# Altium PCB Board_KY-001_v1.PcbDoc
Units mm, origin at the board's own origin, x right, y up, seen from the top; angles counter-clockwise.
Board outline 30 x 14 mm, 2 copper layers (Top Layer, Bottom Layer); 9 components, 5 nets, 20 pads, 90 vias.
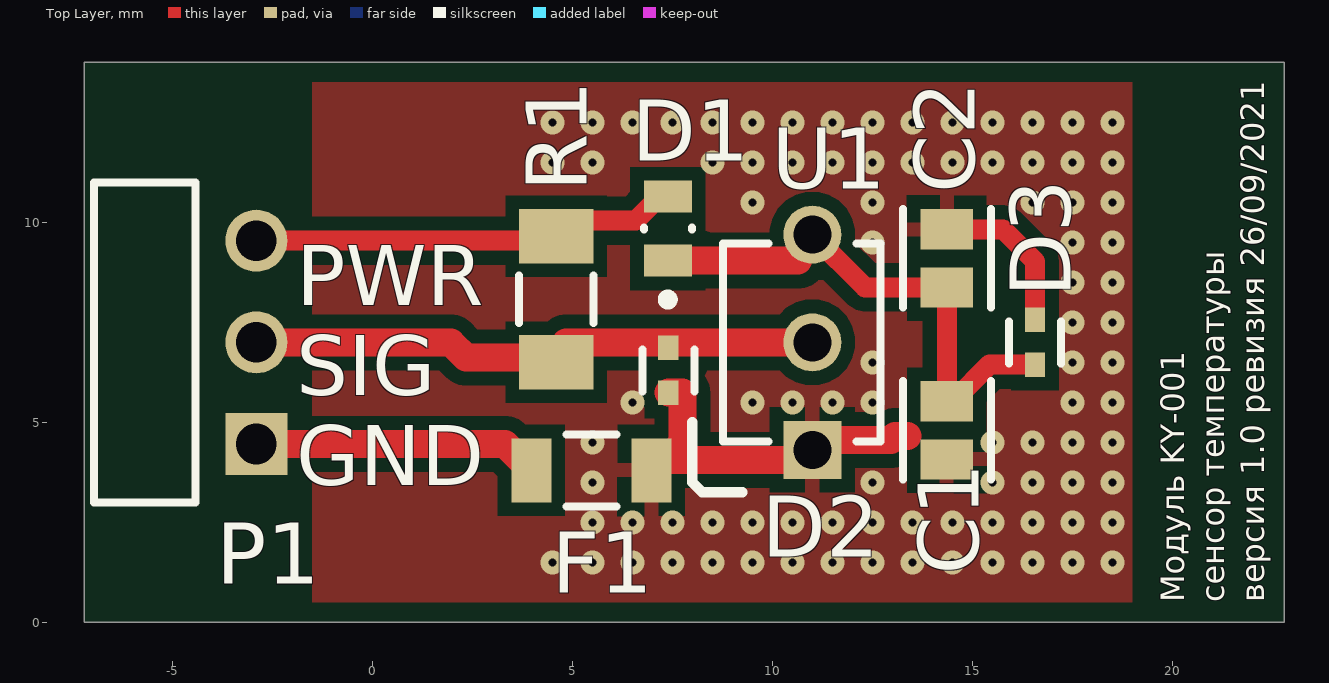
[diagram p0: Top Layer view]
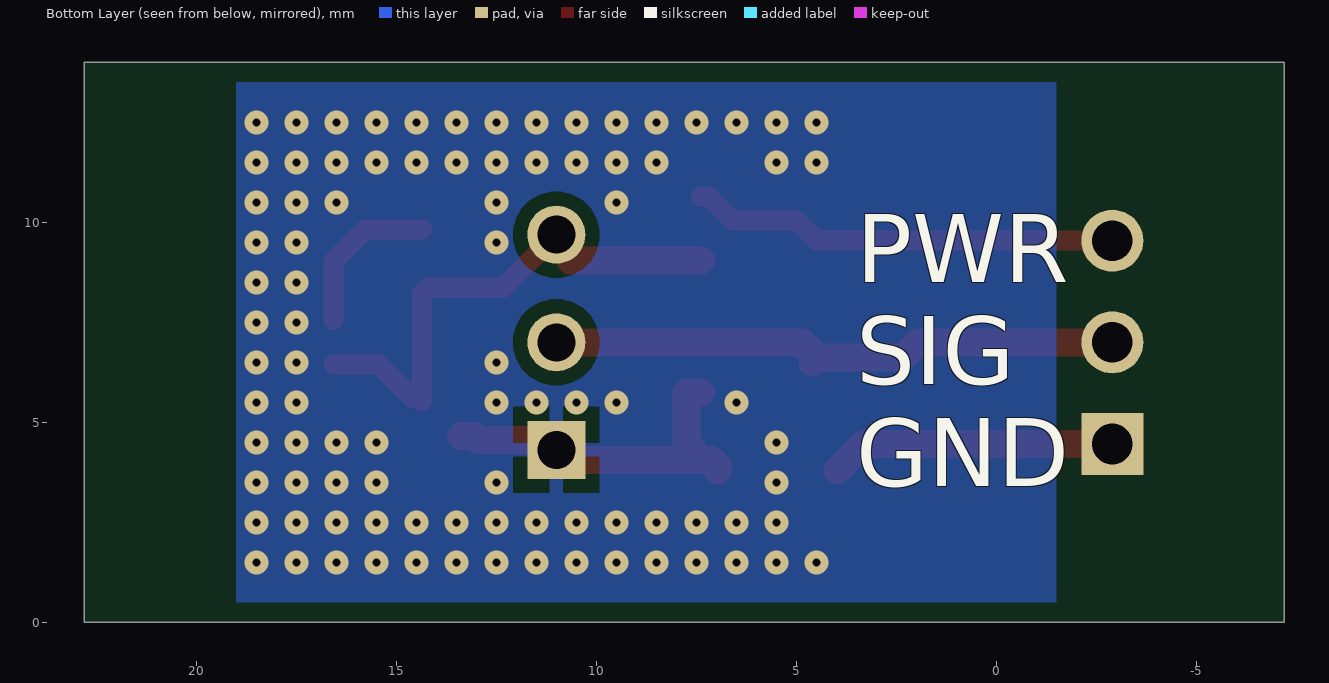
[diagram p1: Bottom Layer view, seen from below]
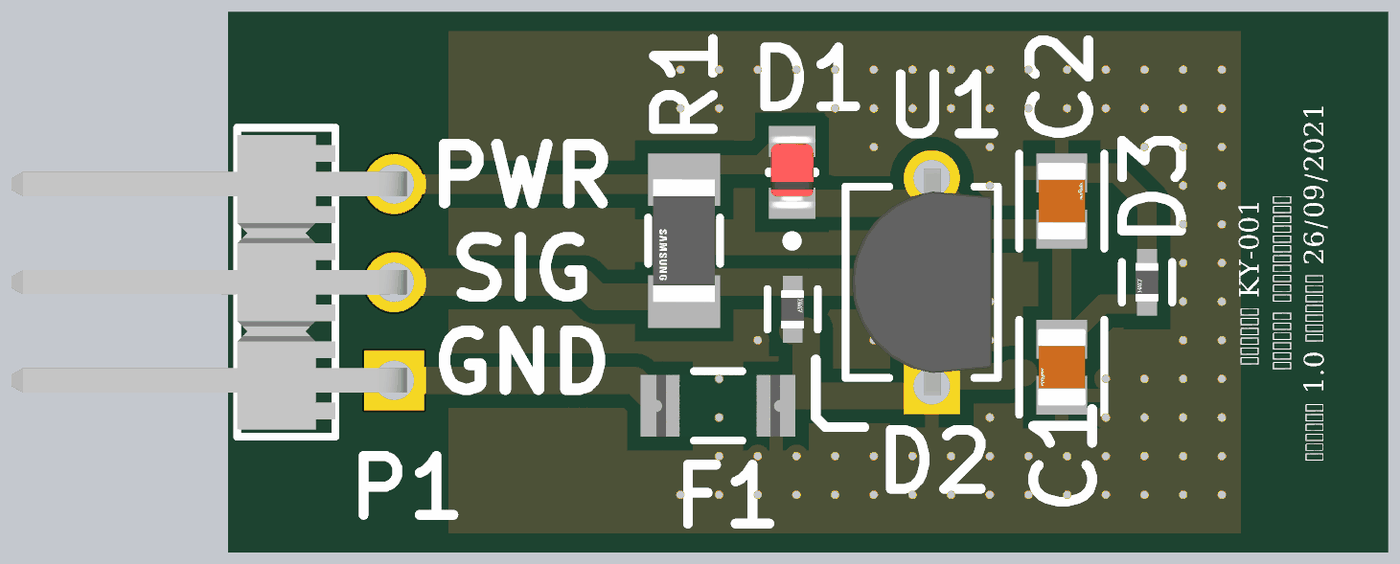
[diagram p2: 3D render of the assembled board from above, using the file's embedded part models]

## Layer stack, top to bottom
Top Solder: solder mask 0.0102, Solder Resist, Dk 3.5
Top Layer: signal copper 0.0356
Dielectric 1: dielectric 0.32, FR-4, Dk 4.8
Bottom Layer: signal copper 0.0356
Bottom Solder: solder mask 0.0102, Solder Resist, Dk 3.5

## Board outline
-7.2,0 -7.2,14 22.8,14 22.8,0

## Design rules (kind name [scope] priority, off if disabled: settings)
AcuteAngle [All] p1: minimum=3.50000000000000E+0001 checktracksonly=FALSE
BoardOutlineClearance "BoardOutlineClearance 1" [All] p1: gap=0.25 ignorepadtopadclearanceinfootprint=FALSE except(0: Arc-SplitContinuation Track-SplitContinuation SMDPad-SplitContinuation THPad-SplitContinuation Via-SplitContinuation Fill-SplitContinuation Poly-SplitContinuation Region-SplitContinuation Text-SplitContinuation) // Milling
BoardOutlineClearance "BoardOutlineClearance 2" [All] p2: gap=0.4 ignorepadtopadclearanceinfootprint=FALSE except(0: Arc-SplitContinuation Track-SplitContinuation SMDPad-SplitContinuation THPad-SplitContinuation Via-SplitContinuation Fill-SplitContinuation Poly-SplitContinuation Region-SplitContinuation Text-SplitContinuation) // V-Cut
Clearance "Clearance 3 Oz" [All] p1: gap=0.35 ignorepadtopadclearanceinfootprint=FALSE except(0.25: Arc-Hole Track-Hole SMDPad-Hole THPad-Hole Via-Hole Fill-Hole Poly-Hole Region-Hole Text-Hole)
Clearance "Clearance 2 Oz" [All] p2: gap=0.3 ignorepadtopadclearanceinfootprint=FALSE except(0.25: Arc-Hole Track-Hole SMDPad-Hole THPad-Hole Via-Hole Fill-Hole Poly-Hole Region-Hole Text-Hole)
Clearance "Clearance-1 1 Oz" [All] p3: gap=0.2 ignorepadtopadclearanceinfootprint=FALSE except(0.25: Arc-Hole Track-Hole SMDPad-Hole THPad-Hole Via-Hole Fill-Hole Poly-Hole Region-Hole Text-Hole) // Standart
Clearance "Clearance-2 1 Oz" [All] p4: gap=0.15 ignorepadtopadclearanceinfootprint=FALSE except(0.2: Arc-Fill Arc-Poly Track-Fill Track-Poly SMDPad-Fill SMDPad-Poly THPad-Fill THPad-Poly Via-Fill Via-Poly Fill-Fill Fill-Poly Poly-Poly; 0.25: Arc-Hole Track-Hole SMDPad-Hole THPad-Hole Via-Hole Fill-Hole Poly-Hole Region-Hole Text-Hole) // Advance
Clearance "Clearance-1 1/2 Oz" [All] p5: gap=0.125 ignorepadtopadclearanceinfootprint=FALSE except(0.2: Arc-Fill Arc-Poly Track-Fill Track-Poly SMDPad-SMDPad SMDPad-Fill SMDPad-Poly THPad-Fill THPad-Poly Via-Fill Via-Poly Fill-Fill Fill-Poly Poly-Poly Poly-Region Poly-Text; 0.25: Arc-Hole Track-Hole SMDPad-Hole THPad-Hole Via-Hole Fill-Hole Poly-Hole Region-Hole Text-Hole) // Standart
Clearance "Clearance-2 1/2 Oz" [All] p6: gap=0.1 ignorepadtopadclearanceinfootprint=FALSE except(0.15: Arc-Fill Arc-Poly Track-Fill Track-Poly SMDPad-SMDPad SMDPad-Fill SMDPad-Poly THPad-Fill THPad-Poly Via-Fill Via-Poly Fill-Fill Fill-Poly Poly-Poly Poly-Region Poly-Text; 0.25: Arc-Hole Track-Hole SMDPad-Hole THPad-Hole Via-Hole Fill-Hole Poly-Hole Region-Hole Text-Hole) // Advance
DiffPairsRouting "DiffPairsRouting 1 Oz" [All] p1: maxlimit=0.254 minlimit=0.2 mostfreqgap=0.254 toplayer_minwidth=0.2 toplayer_maxwidth=0.381 toplayer_prefwidth=0.381 bottomlayer_minwidth=0.2 bottomlayer_maxwidth=0.381 bottomlayer_prefwidth=0.381 maxuncoupledlength=12.7
DiffPairsRouting "DiffPairsRouting 1/2 Oz" [All] p2: maxlimit=0.254 minlimit=0.1 mostfreqgap=0.254 toplayer_minwidth=0.1 toplayer_maxwidth=0.381 toplayer_prefwidth=0.381 bottomlayer_minwidth=0.1 bottomlayer_maxwidth=0.381 bottomlayer_prefwidth=0.381 maxuncoupledlength=12.7
HoleSize "Minimum HoleSize" [IsPad] p1: absolutevalues=TRUE maxlimit=5.9 minlimit=0.6 maxpercent=80.000 minpercent=20.000
HoleSize "Minimum HoleSize VIA 1" [IsVia] p2: absolutevalues=TRUE maxlimit=5.9 minlimit=0.3 maxpercent=80.000 minpercent=20.000 // Standart
HoleSize "Minimum HoleSize VIA 2" [IsVia] p3: absolutevalues=TRUE maxlimit=5.9 minlimit=0.2 maxpercent=80.000 minpercent=20.000 // Advance
HoleToHoleClearance Hole2HoleClearance [All] p1: gap=0.25 allowstackedmicrovias=FALSE
MinimumAnnularRing "Minimum AR VIA Standart" [IsVia] p1: minimumring=0.15
MinimumAnnularRing "Minimum AR PAD Standart" [IsPAD] p2: minimumring=0.2
MinimumAnnularRing "Minimum AR VIA Advance" [IsVia] p3: minimumring=0.1
MinimumAnnularRing "Minimum AR PAD Advance" [IsPAD] p4: minimumring=0.15
MinimumSolderMaskSliver "SolderMask Bridge Standart" [All] p1: minsoldermaskwidth=0.15 // All Masks
MinimumSolderMaskSliver "SolderMask Bridge Advance" [All] p2: minsoldermaskwidth=0.1 // Mask LDI
PlaneClearance "PlaneClearance 3 Oz" [All] p1: clearance=0.35
PlaneClearance "PlaneClearance 2 Oz" [All] p2: clearance=0.3
PlaneClearance "PlaneClearance 1 Oz" [All] p3: clearance=0.2
PlaneClearance "PlaneClearance-1 1/2 Oz" [All] p4: clearance=0.2 // Standart
PlaneClearance "PlaneClearance-2 1/2 Oz" [All] p5: clearance=0.15 // Advance
PlaneConnect "TermalConnect 3 Oz" [All] p1: planeconnectstyle=Relief reliefexpansion=0.2 reliefentries=4 reliefconductorwidth=0.35 reliefairgap=0.35 // Standart
PlaneConnect "TermalConnect 2 Oz" [All] p2: planeconnectstyle=Relief reliefexpansion=0.2 reliefentries=4 reliefconductorwidth=0.3 reliefairgap=0.3 // Standart
PlaneConnect "TermalConnect-1 1 Oz" [All] p3: planeconnectstyle=Relief reliefexpansion=0.2 reliefentries=4 reliefconductorwidth=0.2 reliefairgap=0.2 // Standart
PlaneConnect "TermalConnect-2 1 Oz" [All] p4: pad.planeconnectstyle=Relief pad.reliefexpansion=0.15 pad.reliefentries=4 pad.reliefconductorwidth=0.2 pad.reliefairgap=0.2 via.planeconnectstyle=Direct via.reliefexpansion=0.15 via.reliefentries=4 via.reliefconductorwidth=0.15 via.reliefairgap=0.15 // Advance
PlaneConnect "TermalConnect-1 1/2 Oz" [All] p5: planeconnectstyle=Relief reliefexpansion=0.2 reliefentries=4 reliefconductorwidth=0.2 reliefairgap=0.2 // Standart
PlaneConnect "TermalConnect-2 1/2 Oz" [All] p6: pad.planeconnectstyle=Relief pad.reliefexpansion=0.15 pad.reliefentries=4 pad.reliefconductorwidth=0.15 pad.reliefairgap=0.15 via.planeconnectstyle=Direct via.reliefexpansion=0.15 via.reliefentries=4 via.reliefconductorwidth=0.15 via.reliefairgap=0.15 // Advance
PolygonConnect "PolygonConnect 3 Oz" [All] p1: thpad.connectstyle=Relief thpad.reliefconductorwidth=0.35 thpad.reliefentries=4 thpad.polygonreliefangle="90 Angle" thpad.airgapwidth=0.35 smdpad.connectstyle=Relief smdpad.reliefconductorwidth=0.35 smdpad.reliefentries=4 smdpad.polygonreliefangle="90 Angle" smdpad.airgapwidth=0.35 via.connectstyle=Direct via.reliefconductorwidth=0.254 via.reliefentries=4 via.polygonreliefangle="90 Angle" via.airgapwidth=0.254
PolygonConnect "PolygonConnect 2 Oz" [All] p2: thpad.connectstyle=Relief thpad.reliefconductorwidth=0.3 thpad.reliefentries=4 thpad.polygonreliefangle="90 Angle" thpad.airgapwidth=0.3 smdpad.connectstyle=Relief smdpad.reliefconductorwidth=0.3 smdpad.reliefentries=4 smdpad.polygonreliefangle="90 Angle" smdpad.airgapwidth=0.3 via.connectstyle=Direct via.reliefconductorwidth=0.254 via.reliefentries=4 via.polygonreliefangle="90 Angle" via.airgapwidth=0.254
PolygonConnect "PolygonConnect-1 1 Oz" [All] p3: thpad.connectstyle=Relief thpad.reliefconductorwidth=0.2 thpad.reliefentries=4 thpad.polygonreliefangle="90 Angle" thpad.airgapwidth=0.2 smdpad.connectstyle=Relief smdpad.reliefconductorwidth=0.2 smdpad.reliefentries=4 smdpad.polygonreliefangle="90 Angle" smdpad.airgapwidth=0.2 via.connectstyle=Direct via.reliefconductorwidth=0.254 via.reliefentries=4 via.polygonreliefangle="90 Angle" via.airgapwidth=0.254 // Standart
PolygonConnect "PolygonConnect-2 1 Oz" [All] p4: thpad.connectstyle=Relief thpad.reliefconductorwidth=0.15 thpad.reliefentries=4 thpad.polygonreliefangle="90 Angle" thpad.airgapwidth=0.15 smdpad.connectstyle=Relief smdpad.reliefconductorwidth=0.15 smdpad.reliefentries=4 smdpad.polygonreliefangle="90 Angle" smdpad.airgapwidth=0.15 via.connectstyle=Direct via.reliefconductorwidth=0.254 via.reliefentries=4 via.polygonreliefangle="90 Angle" via.airgapwidth=0.254 // Advance
PolygonConnect "PolygonConnect-1 1/2 Oz" [All] p5: thpad.connectstyle=Relief thpad.reliefconductorwidth=0.15 thpad.reliefentries=4 thpad.polygonreliefangle="90 Angle" thpad.airgapwidth=0.2 smdpad.connectstyle=Relief smdpad.reliefconductorwidth=0.2 smdpad.reliefentries=4 smdpad.polygonreliefangle="90 Angle" smdpad.airgapwidth=0.2 via.connectstyle=Direct via.reliefconductorwidth=0.254 via.reliefentries=4 via.polygonreliefangle="90 Angle" via.airgapwidth=0.254 // Standart
PolygonConnect "PolygonConnect-2 1/2 Oz" [All] p6: thpad.connectstyle=Relief thpad.reliefconductorwidth=0.125 thpad.reliefentries=4 thpad.polygonreliefangle="90 Angle" thpad.airgapwidth=0.15 smdpad.connectstyle=Relief smdpad.reliefconductorwidth=0.125 smdpad.reliefentries=4 smdpad.polygonreliefangle="90 Angle" smdpad.airgapwidth=0.15 via.connectstyle=Direct via.reliefconductorwidth=0.254 via.reliefentries=4 via.polygonreliefangle="90 Angle" via.airgapwidth=0.254 // Advance
RoutingCorners [All] p1 off: cornerstyle=45-Degree minsetback=2.54 maxsetback=2.54
RoutingVias [All] p1: holewidth=0.3 width=0.6 viastyle="Through Hole" minholewidth=0.2 minwidth=0.4 maxholewidth=5.9 maxwidth=6.4
SilkToSilkClearance Silk2SilkClearance [All] p1 off: silktosilkclearance=0.15
SilkToSolderMaskClearance Silk2SolderMaskClearance [IsPad] p1 off: minsilkscreentomaskgap=0.15 clearancetoexposedcopper=TRUE
SolderMaskExpansion SolderMaskExpansion-1 [All] p1: expansion=0.05 istentingtop=FALSE // Standart
SolderMaskExpansion "SolderMaskExpansion LDI" [All] p2: expansion=0.025 istentingtop=FALSE // Advance
UnRoutedNet [All] p1: checkbadconnections=TRUE
Width "Width 3 Oz" [All] p1: maxlimit=10 minlimit=0.35 preferedwidth=0.4 checkconnectedcopper=TRUE
Width "Width 2 Oz" [All] p2: maxlimit=10 minlimit=0.3 preferedwidth=0.35 minimp=50.000000 maximp=50.000000 favimp=50.000000 checkconnectedcopper=TRUE
Width "Width 1 Oz" [All] p3: maxlimit=10 minlimit=0.15 preferedwidth=0.2 checkconnectedcopper=TRUE
Width "Width 1/2 Oz" [All] p4: maxlimit=10 minlimit=0.1 preferedwidth=0.125 checkconnectedcopper=TRUE
20 further rules are at their usual default settings.

## Components (designator, comment, footprint, x,y, rotation, side; value= is the part's Value field where it differs from the comment)
C1 "GCD21BR71H104KA01L" FP-GCD21B-0_15-IPC_C 14.362,4.8 r270 top
C2 "GCD21BR71H104KA01L" FP-GCD21B-0_15-IPC_C 14.362,9.1 r90 top
D1 "BAS385-TR" FP-6_560-5007_01-4-MFG 7.387,9.844 r90 top value=10pF
D2 "GG040205170N2P" FP-GG0402-MFG 7.4,6.3 r90 top value=17pF
D3 "GG040205170N2P" FP-GG0402-MFG 16.566,7 r270 top value=17pF
F1 "MF-NSMF020-2" FP-MF-NSMF020-2-MFG 5.474,3.8 r180 top value=0.6-2.6Ω
P1 "TSW-103-08-L-S-RA" SMTC-TSW-103-08-X-S-RA -2.9,4.46 r90 top
R1 "RC3216F472CS" FP-RC3216-IPC_A 4.596,8.076 r270 top
U1 "DS18B20+T&R" FP-Q3-4-MFG 10.738,7 r0 top

## Footprints (in the part's own frame and the unit in brackets; to place one, negate y for a bottom-side part, rotate by r counter-clockwise, add the part's x,y. Pads: shape width x height; smd on the part's side, far side on the other; paste and mask are expansions set on the pad)
FP-6_560-5007_01-4-MFG [mm]
  rect 0.8x1.2 smd paste+0 mask+0: 1(-0.8,0) 2(0.8,0)
  silkscreen extent -1.9,-0.6 0.02,0.6, body extent -1.3,-0.7 1.3,0.7, height 0.25
FP-GCD21B-0_15-IPC_C [mm]
  rect 1.006x1.308 smd paste+0 mask+0: 1(-0.726,0) 2(0.726,0)
  silkscreen extent -1.23,-1.1 1.23,1.1, body extent -1.33,-0.8 1.33,0.8, height 0.25
FP-GG0402-MFG [mm]
  rect 0.61x0.51 smd paste+0 mask+0: 1(-0.56,0) 2(0.56,0)
  silkscreen extent -0.53,-0.65 0.53,0.65, body extent -0.96,-0.43 0.96,0.43, height 0.25
FP-MF-NSMF020-2-MFG [mm]
  rect 1x1.6 smd paste+0 mask+0: 1(-1.5,0) 2(1.5,0)
  silkscreen extent -0.63,-0.9 0.63,0.9, body extent -2.1,-1 2.1,1, height 0.25
FP-Q3-4-MFG [mm]
  rect 1.45x1.45 hole 0.95 paste-1000 mask+0: 1(0.262,-2.69)
  round 1.45 hole 0.95 paste-1000 mask+0: 2(0.262,0) 3(0.262,2.69)
  silkscreen extent -1.97,-2.47 1.97,2.47, body extent -2.07,-3.51 2.07,3.51, height 0.25
FP-RC3216-IPC_A [mm]
  rect 1.355x1.858 smd paste+0 mask+0: 1(-1.576,0) 2(1.576,0)
  silkscreen extent -0.6,-0.93 0.6,0.93, body extent -2.75,-1.43 2.75,1.43, height 0.25
SMTC-TSW-103-08-X-S-RA [mm] ".025 SQ Post Terminal Strip Assembly, 1x3 Pins, Right Angle, 2.54mm Pitch, Male"
  rect 1.55x1.55 hole 1.02: 1(0,0)
  round 1.55 hole 1.02: 2(2.54,0) 3(5.08,0)
  silkscreen extent -1.46,1.52 6.54,4.06, body extent -1.27,-0.32 6.35,9.9, height 3.05

## Part data
C1 C2: library part CMP-06035-045527-1, "Chip Multilayer Ceramic Capacitors for Automotive, 0805, 0.10uF, X7R, 15%, 10%, 50V, Grade 1", Capacitance=100nF, Case Code (Imperial)=0805, Case Code (Metric)=2012, Dielectric=X7R, Max Operating Temperature=125°C, Min Operating Temperature=-55°C, Package Quantity=3000, Ratings=AEC-Q200, Tolerance=10%, Voltage Rating=50V, Case/Package=0805, Depth=1.25mm, Height=1.25mm, Length=2mm, Mount="Surface Mount", Packaging="Tape and Reel", Termination=SMD/SMT, Thickness=0.049inch, Voltage Rating (DC)=50V, Weight=0.000335oz, Width=0.049inch
D1: library part CMP-02539-000034-1, "DIODE SCHOTTKY 30V 200MA MICMELF", Capacitance=10pF, Forward Current=200mA, Manufacturer=Vishay, Max Surge Forward Current=5A, Max Temp=+125°C, Package=6.560-5007.01-4, Peak Reverse Current=2.3uA, Reverse Voltage=30V, Temperature="to +125°C", Automotive=Yes, Automotive Grade="Grade 1", Category=Diode, ComponentLink2Description=Datasheet, ComponentLink2URL=http://www.vishay.com/docs/85504/bas385.pdf, Device Class L1="Discrete Semiconductors", Device Class L2=Diodes, Device Class L3="Schottky Diodes", Digikey Description="DIODE SCHOTTKY 30V 200MA MICMELF", Height=1.2mm, Lead Free=Yes, Mouser Description="Schottky Diodes & Rectifiers 30 Volt 200mA 300mA IFSM", Octopart=https://octopart.com/bas385-tr-vishay-55507548, Part Number=BAS385-TR, RoHS=TRUE, Temperature Range High=+125°C
D2 D3: library part CMP-04587-000002-1, "TVS DIODE 5V 10V 0402", Breakdown Voltage=5.1V, Capacitance=17pF, Clamping Voltage=10V, Manufacturer=AVX, Package=GG0402, Peak Pulse Current=8A, Peak Pulse Power=80W, Reverse Standoff Voltage=5V, Temperature="-55°C to +125°C", Temperature Range High=+125°C, Temperature Range Low=-55°C, Automotive=No, Category=Diode, ComponentLink2Description=Datasheet, ComponentLink2URL=http://datasheets.avx.com/AVX-GiGuard.pdf, Device Class L1="Circuit Protection", Device Class L2="TVS Diodes", Device Class L3=unset, Digikey Description="TVS DIODE 5V 10V 0402", Direction=Bidirectional, Height=0.55mm, Ipc Land Pattern Name=DIOC10060X50, Lead Free=Yes, Mouser Description="ESD Suppressor TVS Bi-Dir 5V 2-Pin Case 0402(1006Metric) T/R", Number Of Channels=1, Octopart=https://octopart.com/gg040205170n2p-avx-81066082, Part Number=GG040205170N2P, RoHS=TRUE
F1: library part CMP-07400-000029-1, "PTC RESET FUSE 24V 200MA 1206", Current Rating=10A, Hold Current=0.2A, Manufacturer=Bourns, Resistance=0.6-2.6Ω, Temperature="-40°C to +85°C", Temperature High=+85°C, Temperature Low=-40°C, Trip Current=0.46A, Voltage Rating=24V, Automotive=Yes, Automotive Grade="Grade 3", Category=Fuse, ComponentLink2Description=Datasheet, ComponentLink2URL=https://www.bourns.com/docs/Product-Datasheets/mfnsmf.pdf, Device Class L1="Circuit Protection", Device Class L2="PTC Resettable Fuses", Device Class L3=unset, Digikey Description="PTC RESET FUSE 24V 200MA 1206", Height=0.85mm, Lead Free=Yes, Manufacturer Part Number=MF-NSMF020-2, Mouser Description="Resettable Fuses - PPTC 0.20A 24V 0.60ohm MAX (R)", Octopart=https://octopart.com/mf-nsmf020-2-bourns-94649, Package=MF-NSMF020-2, RoHS=TRUE, Temperature Range High=+85°C, Temperature Range Low=-40°C, Trip Time=0.6s
P1: library part CMP-1024-00343-1, "0.025\" SQ Post Header, Through-hole, Right Angle, -55 to 125 degC, 2.54 mm Pitch, 3-Pin, Male, RoHS", Manufacturer=Samtec, Temperature Range="-55 to 125 degC", ComponentLink1Description="Manufacturer URL", ComponentLink1URL=http://www.samtec.com, ComponentLink2Description=Datasheet, ComponentLink2URL=http://www.samtec.com/documents/webfiles/pdf/TSW_TH.PDF, ComponentLink3Description="Package Specification", ComponentLink3URL=http://www.samtec.com/documents/webfiles/cpdf/TSW-XXX-XX-XXX-X-XX-XXX-MKT.pdf, DatasheetVersion=F-214, Mounting Technology=Through-hole, Orientation="Right Angle", PackageDescription=".025[0.64] SQ. Post Terminal Strip Assembly", PackageReference=TSW-103-08-X-S-RA, PackageVersion="DM, 8/1988", PartNumber=TSW-103-08-L-S-RA, Pitch="2.54 mm", RoHS=True
R1: library part CMP-13261-005727-1, "Res Thick Film 1206 4.7kΩ 1% 0.25W ±100ppm/°C Molded SMD T/R", Case Code (Imperial)=1206, Case Code (Metric)=3216, Max Operating Temperature=155°C, Max Power Dissipation=250mW, Min Operating Temperature=-55°C, Resistance=4.7kR, Temperature Coefficient=100ppm/°C, Tolerance=1%, Voltage Rating (DC)=200V, Composition="Thick Film", Contact Plating=Tin, Depth=1.6mm, Features="Moisture Resistant", Height=0.026inch, Lead Free="Lead Free", Length=0.126inch, Military Standard=Not, Number of Terminations=2, Package=1206, Packaging="Tape and Reel", Radiation Hardening=No, Width=0.063inch
U1: library part CMP-0253-00001-2, "SENSOR DIGITAL -55C-125C TO92-3", Manufacturer="Maxim Integrated", Max Supply Voltage=5.5V, Min Supply Voltage=3V, Operating Supply Current=1mA, Package=Q3-4, Temperature="-55°C to +125°C", Temperature Range High=+125°C, Temperature Range Low=-55°C, Automotive=No, Category=IC, ComponentLink2Description=Datasheet, ComponentLink2URL=https://datasheets.maximintegrated.com/en/ds/DS18B20.pdf, Device Class L1=Sensors, Device Class L2="Temperature and Humidity Sensors", Device Class L3=unset, Digikey Description="SENSOR DIGITAL -55C-125C TO92-3", Height=9.4mm, Interface=Other, Lead Free=Yes, Mouser Description="Board Mount Temperature Sensors", Octopart=https://octopart.com/ds18b20%2Bt%26r-maxim+integrated-10547047, Pack=TO-92, Part Number=DS18B20+T&R, Resolution=9/10/11/12bits, RoHS=TRUE, Sensor Output=Other, Standoff Height=0.51mm

## Via types
v1: diameter 0.6, hole 0.2, Top Layer to Bottom Layer, tented both sides, 90 vias

## Nets (pads, with @x,y where several pads share a name; then routed paths per layer and width w, separated by ;. In a path a pad name is that pad's centre, name@x,y a point inside that pad or via, vN(x,y) a via of type N, cw(c..) or ccw(c..) an arc to the next point about the centre after c; other vN are vias at no path point)
GND: C1.2 C2.2 D2.1 D3.1 F1.1 U1.1 | length 12.8
  Top Layer w0.254: 13.382,4.655 13.474,4.562
  Top Layer w0.5: C2.2 15.766,9.826 16.566,9.026 D3.1
  Top Layer w0.7: F1.1 6.974,3.905 7.124,4.055 7.6,4.055 10.745,4.055 11.254,4.564 12.972,4.564 13.062,4.655 13.382,4.655 ; D2.1 7.75,5.74 7.75,4.481 7.6,4.331
  other v1: 4.5,1.5 5.5,1.5 6.5,1.5 7.5,1.5 8.5,1.5 9.5,1.5 10.5,1.5 11.5,1.5 12.5,1.5 13.5,1.5 14.5,1.5 15.5,1.5 16.5,1.5 17.5,1.5 18.5,1.5 5.5,2.5 6.5,2.5 7.5,2.5 8.5,2.5 9.5,2.5 10.5,2.5 11.5,2.5 12.5,2.5 13.5,2.5 14.5,2.5 15.5,2.5 16.5,2.5 17.5,2.5 18.5,2.5 5.5,3.5 12.5,3.5 15.5,3.5 16.5,3.5 17.5,3.5 18.5,3.5 5.5,4.5 15.5,4.5 16.5,4.5 17.5,4.5 18.5,4.5 6.5,5.5 9.5,5.5 10.5,5.5 11.5,5.5 12.5,5.5 17.5,5.5 18.5,5.5 12.5,6.5 17.5,6.5 18.5,6.5 17.5,7.5 18.5,7.5 17.5,8.5 18.5,8.5 12.5,9.5 17.5,9.5 18.5,9.5 9.5,10.5 12.5,10.5 16.5,10.5 17.5,10.5 18.5,10.5 4.5,11.5 5.5,11.5 8.5,11.5 9.5,11.5 10.5,11.5 11.5,11.5 12.5,11.5 13.5,11.5 14.5,11.5 15.5,11.5 16.5,11.5 17.5,11.5 18.5,11.5 4.5,12.5 5.5,12.5 6.5,12.5 7.5,12.5 8.5,12.5 9.5,12.5 10.5,12.5 11.5,12.5 12.5,12.5 13.5,12.5 14.5,12.5 15.5,12.5 16.5,12.5 17.5,12.5 18.5,12.5
"Ground 0.0VDC": F1.2 P1.1 | length 7.1
  Top Layer w0.7: P1.1 3.314,4.46 F1.2
NetC1_1: C1.1 C2.1 D1.1 D3.2 U1.3 | length 13
  Top Layer w0.5: U1.3 12.316,8.374 14.211,8.374 14.362,8.223 C1.1 ; C1.1@14.589,5.603 15.427,6.44 D3.2
  Top Layer w0.7: D1.1 10.643,9.044 10.643,9.13 11,9.487 U1.3
"Power +5.0VDC": D1.2 P1.3 R1.1 | length 10.7
  Top Layer w0.5: P1.3 4.485,9.54 R1.1 4.989,10.044 6.587,10.044 7.187,10.644 D1.2
"Signal 1WireBUS DQ": D2.2 P1.2 R1.2 U1.2 | length 14.4
  Top Layer w0.7: P1.2 1.961,7 2.337,6.624 R1.2@4.472,6.624 ; R1.2 R1.2@4.472,6.624 ; U1.2 4.848,7 R1.2@4.472,6.624

## Polygon pours and split planes (outlines as drawn)
GND on Top Layer "GND_L01_P000" (solid, remove dead copper, pour order 0): -1.5,13.5 19,13.5 19,0.5 -1.5,0.5
GND on Bottom Layer "GND_L02_P001" (solid, pour order 1): 19,0.5 19,13.5 -1.5,13.5 -1.5,0.5

## Silkscreen, mask and mechanical layers (free items; w line width, h text height)
Top Overlay:
  lines w0.254: 8,5 8,3.5 8.25,3.25 9.25,3.25
  text "PWR / SIG / GND" at -1.899,3.431 h1.5
  text "Модуль KY-001  / сенсор температуры / версия 1.0 ревизия 26/09/2021" at 22.5,0.499 h1 r90
Bottom Overlay:
  text "PWR / SIG / GND" at 3.5,3.4 h1.7
Mechanical 1:
  the board outline again, w0.254

## Dimensions
-7.2,14 to 22.8,14 on Mechanical 1
-7.2,14 to -7.2,0 on Mechanical 1